# Altium PCB STM32.PcbDoc
Units mm, origin at the board's own origin, x right, y up, seen from the top; angles counter-clockwise.
Board outline 45.69 x 44.56 mm, 4 copper layers (L1[SIG], L2[GND], L3[GND], L4[SIG]), stack 1.591 mm thick; 35 components, 27 nets, 170 pads, 85 vias.
Unrouted connection lines stored in the file: 1.
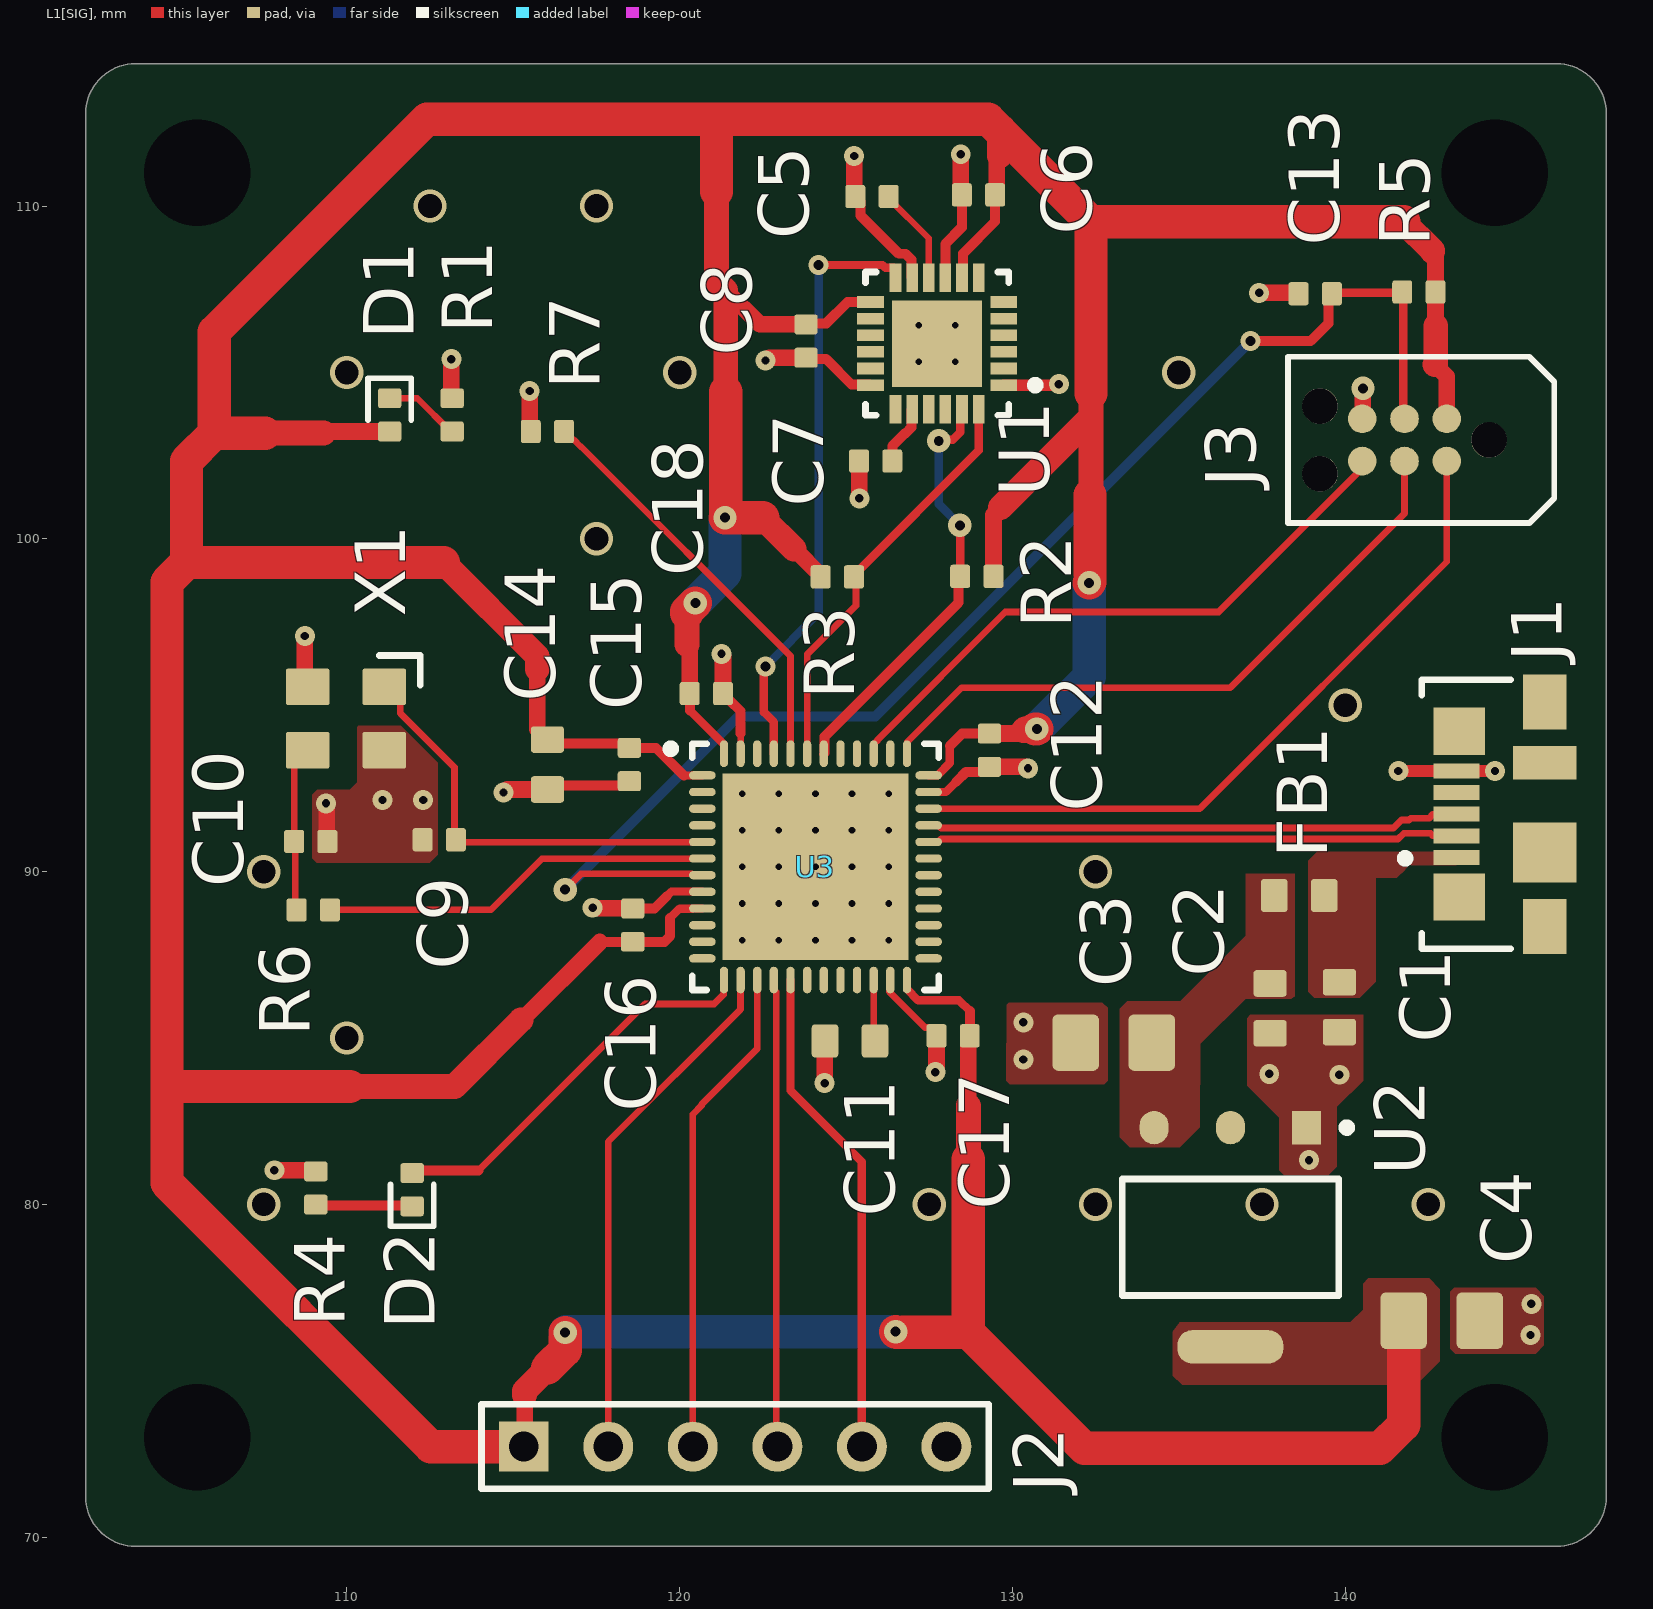
[diagram p0: L1[SIG] view]
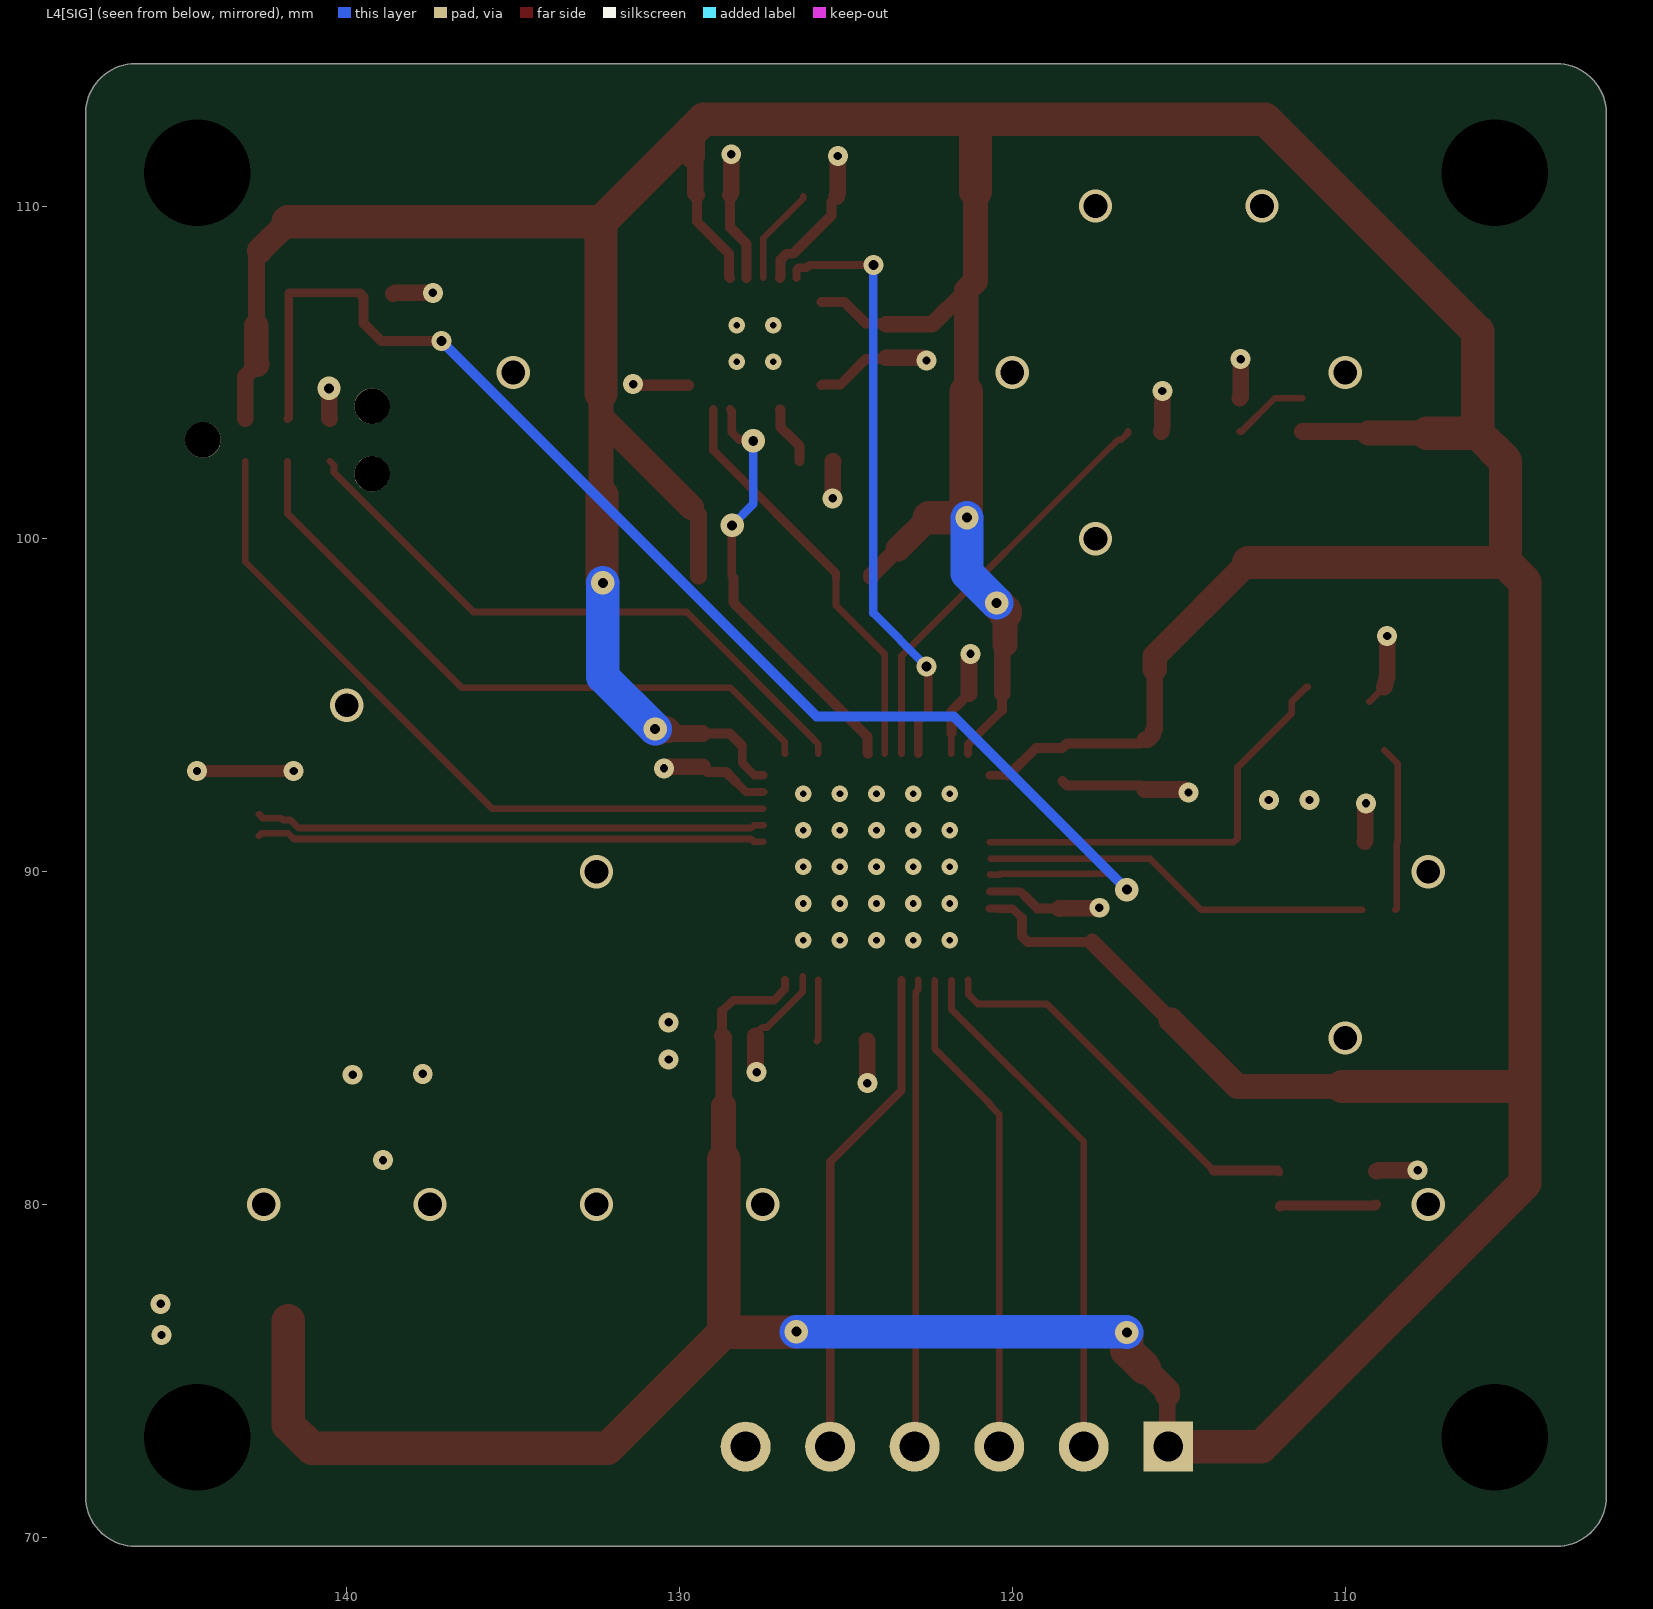
[diagram p1: L4[SIG] view, seen from below]
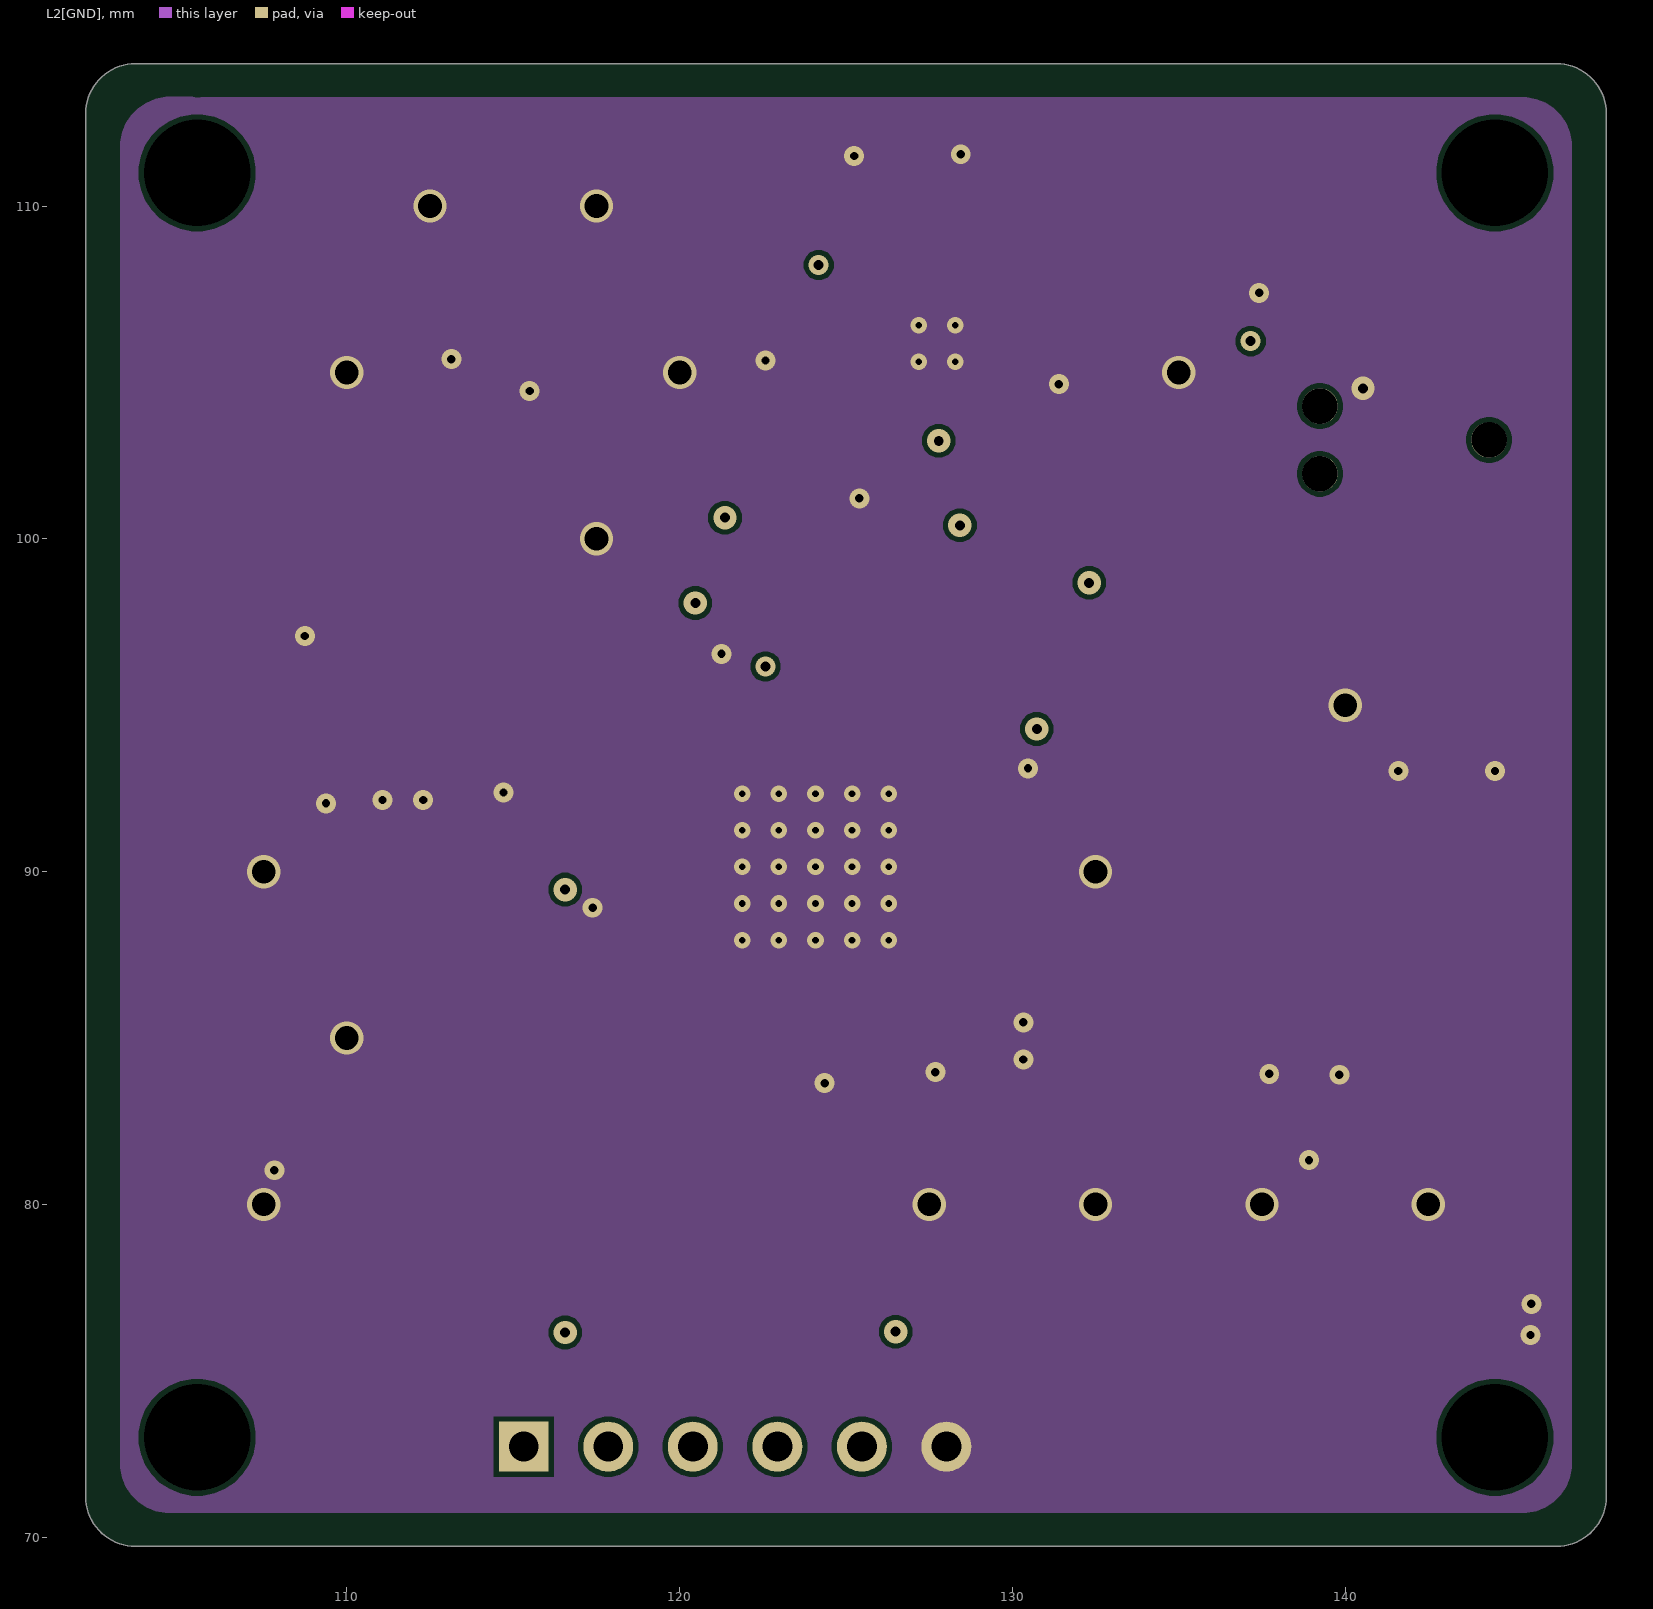
[diagram p2: L2[GND]]
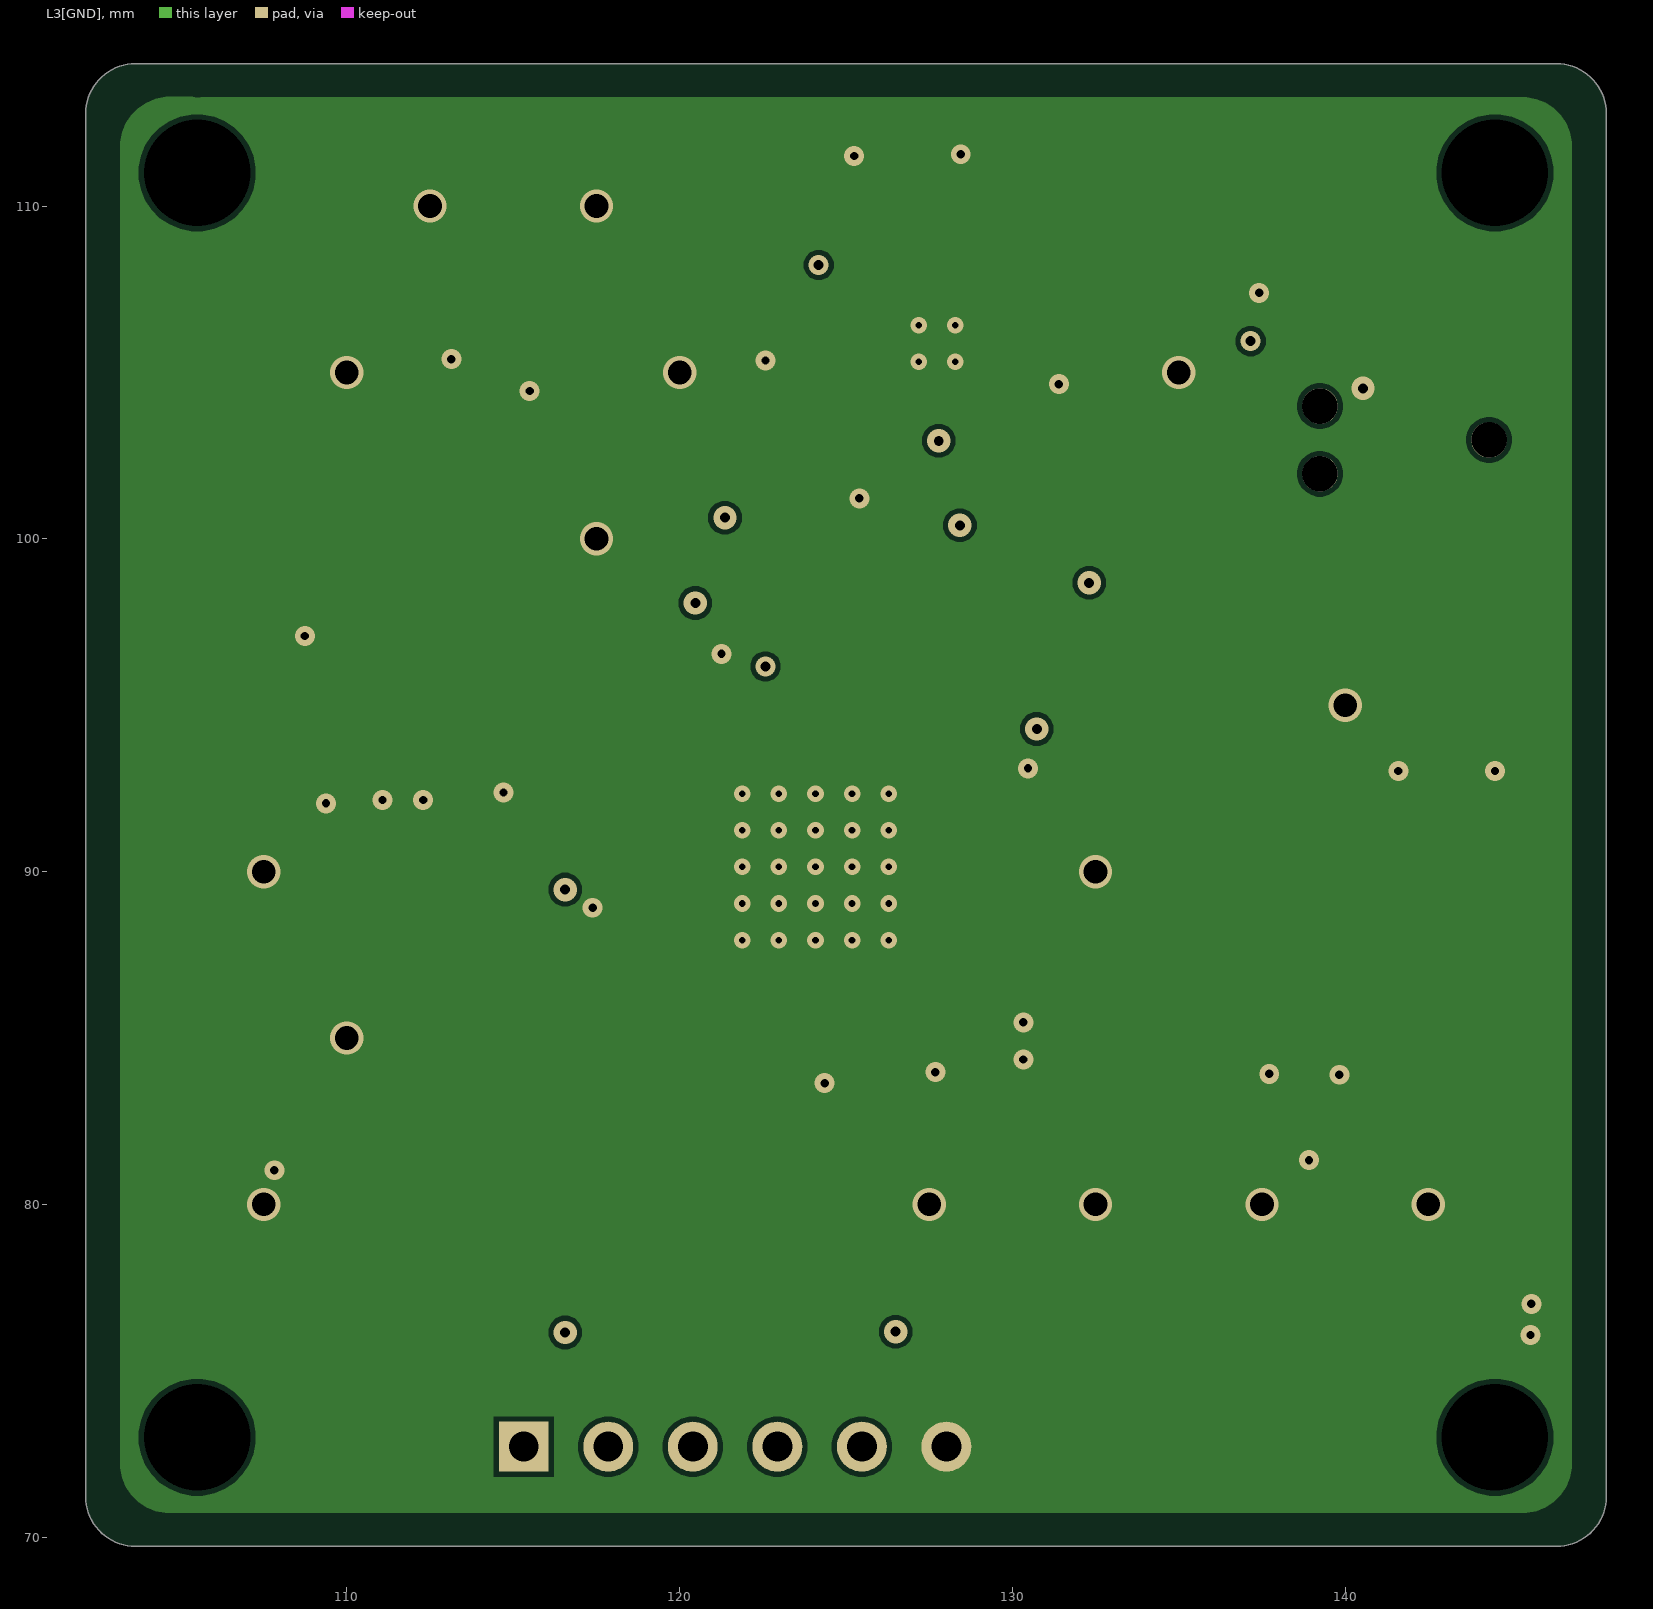
[diagram p3: L3[GND]]
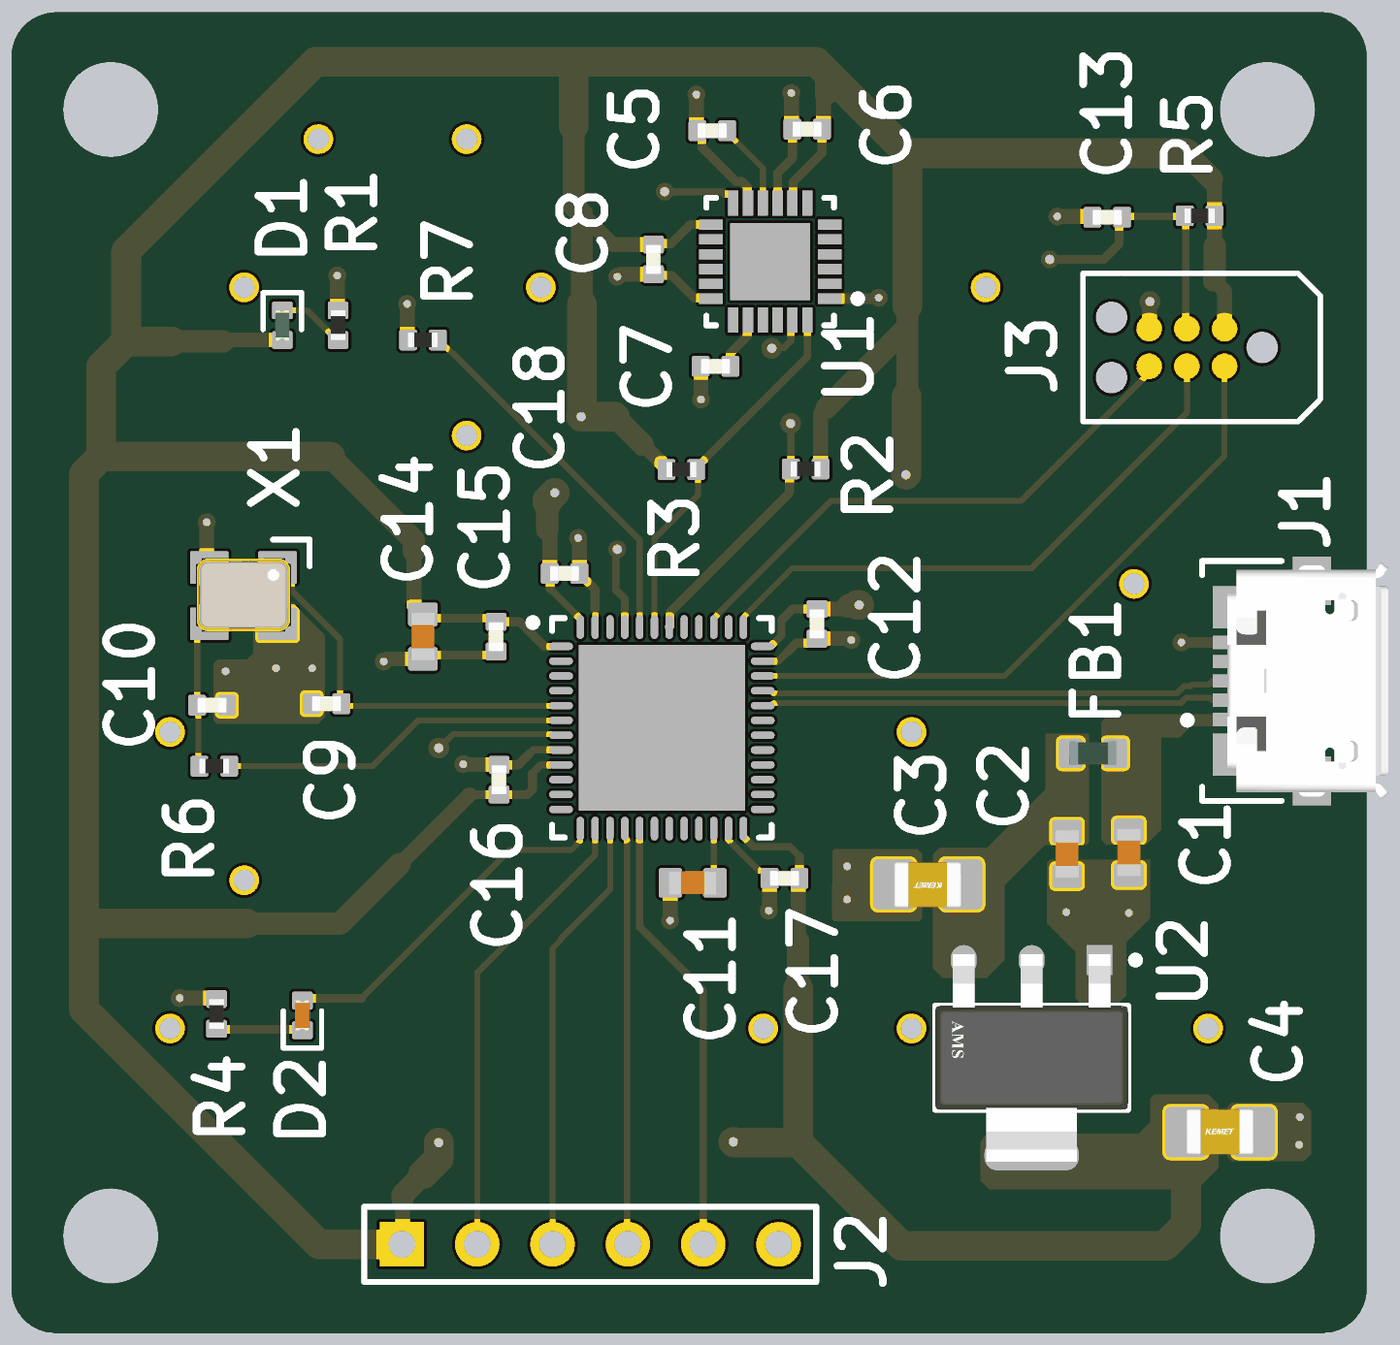
[diagram p4: 3D render of the assembled board from above, using the file's embedded part models]

## Layer stack, top to bottom
Top Solder: solder mask 0.0127, SM-001, Dk 4
L1[SIG]: signal copper 0.035
Dielectric 1: prepreg 0.2104, PP-017, Dk 4.4
L2[GND]: signal copper 0.0175
Dielectric 3: core 1.065, Core-039, Dk 4.6
L3[GND]: signal copper 0.0175
Dielectric 5: prepreg 0.2104, PP-017, Dk 4.4
L4[SIG]: signal copper 0.035
Bottom Solder: solder mask 0.0127, SM-001, Dk 4

## Board outline
102.153,71.222 102.153,112.778 cw(c103.653,112.778) 103.653,114.278 146.347,114.278 cw(c146.347,112.778) 147.847,112.778 147.847,71.222 cw(c146.347,71.222) 146.347,69.722 103.653,69.722 cw(c103.653,71.222)

## Design rules (kind name [scope] priority, off if disabled: settings)
Clearance [All] p1: gap=0.15 ignorepadtopadclearanceinfootprint=FALSE
DiffPairsRouting [All] p1: maxlimit=0.254 minlimit=0.127 mostfreqgap=0.254 toplayer_maxgap=0.127 toplayer_prefgap=0.127 toplayer_minwidth=0.203 toplayer_maxwidth=0.203 toplayer_prefwidth=0.203 bottomlayer_maxgap=0.127 bottomlayer_prefgap=0.127 bottomlayer_minwidth=0.203 bottomlayer_maxwidth=0.203 bottomlayer_prefwidth=0.203 impedanceprofiledriven=TRUE impedanceprofileid={67ABD6B7-572A-422F-AA8D-473EE327C9B9} impedanceprofilevalue=90.000000 maxuncoupledlength=12.7
PolygonConnect [All] p1: connectstyle=Direct reliefconductorwidth=0.254 reliefentries=4 polygonreliefangle="45 Angle" airgapwidth=0.254
RoutingVias [All] p1: holewidth=0.3 width=0.7 viastyle="Through Hole" minholewidth=0.25 minwidth=0.55 maxholewidth=0.4 maxwidth=0.9
SolderMaskExpansion [All] p1: expansion=0.102 istentingtop=FALSE
UnRoutedNet [All] p1: checkbadconnections=TRUE
Width [All] p1: maxlimit=1 minlimit=0.2 preferedwidth=0.3 midlayer1_minwidth=0.254 midlayer1_maxwidth=0.254 midlayer1_prefwidth=0.254 midlayer2_minwidth=0.254 midlayer2_maxwidth=0.254 midlayer2_prefwidth=0.254 minimp=50.000000 maximp=50.000000 favimp=50.000000
28 further rules are at their usual default settings.

## Classes and differential pairs
differential pair class DIFF_USB: USB_D
differential pair USB_D: +USB_D_P -USB_D_N

## Components (designator, comment, footprint, x,y, rotation, side; value= is the part's Value field where it differs from the comment)
C1 "2u2" CAP_0603 139.827,85.928 r270 top
C2 "2u2" CAP_0603 137.744,85.889 r270 top
C3 "22u" CAP_0805 133.045,84.861 r180 top
C4 "22u" CAP_0805 142.9,76.505 r0 top
C5 "100n" CAP_0402 125.781,110.287 r0 top
C6 "10n" CAP_0402 128.981,110.338 r0 top
C7 "2n2" CAP_0402 125.89,102.337 r0 top
C8 "100n" CAP_0402 123.8,105.943 r90 top
C9 "100n" CAP_0402 112.776,90.957 r0 top
C10 "100n" CAP_0402 108.915,90.907 r180 top
C11 "2u2" CAP_0603 125.12,84.912 r180 top
C12 "100n" CAP_0402 129.311,93.65 r90 top
C13 "100n" CAP_0402 139.098,107.366 r0 top
C14 "2u2" CAP_0603 116.027,93.218 r270 top
C15 "100n" CAP_0402 118.491,93.218 r90 top
C16 "100n" CAP_0402 118.593,88.392 r270 top
C17 "100n" CAP_0402 128.219,85.065 r0 top
C18 "100n" CAP_0402 120.802,95.352 r180 top
D1 "GREEN" LED_0402_GREEN 111.286,103.725 r90 top
D2 "RED" LED_0402_RED 111.963,80.442 r270 top
FB1 "120R" FB_0603 138.62,89.281 r180 top
J1 "473460001" FP-473460001-MFG 145.65,91.725 r90 top
J2 "Header 6" HDR1X6 115.316,72.72 r0 top
J3 "TC2030" TC2030-FP 141.783,102.972 r180 top
R1 "1k" RES_0402 113.166,103.725 r270 top
R2 "2k2" RES_0402 128.931,98.874 r0 top
R3 "2k2" RES_0402 124.739,98.857 r180 top
R4 "1k" RES_0402 109.068,80.493 r270 top
R5 "10k" RES_0402 142.215,107.417 r0 top
R6 "0R" RES_0402 108.991,88.849 r180 top
R7 "10k" RES_0402 116.027,103.226 r0 top
U1 "MPU-6050" IS-QFN-24_V 127.737,105.867 r180 top
U2 "ams1117" FP-ams1117-IPC_C 136.55,79.012 r270 top
U3 "STM32F411CEU6" STM-UFQFPN48_L 124.083,90.142 r0 top
X1 "24MHz" XTAL_3225 109.975,94.6 r180 top

## Footprints (in the part's own frame and the unit in brackets; to place one, negate y for a bottom-side part, rotate by r counter-clockwise, add the part's x,y. Pads: shape width x height; smd on the part's side, far side on the other; paste and mask are expansions set on the pad)
CAP_0402 [mm]
  rrect25% 0.6x0.7 smd: 1(-0.5,0) 2(0.5,0)
  body extent -0.5,-0.26 0.5,0.26, height 0.37
CAP_0603 [mm]
  rrect25% 0.8x1 smd: 1(-0.75,0) 2(0.75,0)
  body extent -0.8,-0.4 0.8,0.4, height 0.51
CAP_0805 [mm]
  rrect25% 1.4x1.7 smd: 1(-1.143,0) 2(1.143,0)
  body extent -1.15,-0.76 1.15,0.79, height 1.01
FB_0603 [mm]
  rrect25% 0.8x1 smd: 1(-0.75,0) 2(0.75,0)
  body extent -0.8,-0.4 0.8,0.4, height 0.81
FP-473460001-MFG [mm]
  rect 0.45x1.38 smd paste+0 mask+0: 1(-1.3,2.31) 2(-0.65,2.31) 3(0,2.31) 4(0.65,2.31) 5(1.3,2.31)
  rect 1.425x1.55 smd paste+0 mask+0: 6(-2.488,2.225) 7(2.488,2.225)
  rect 1.65x1.3 smd paste+0 mask+0: 8(-3.375,-0.35) 11(3.375,-0.35)
  rect 1.8x1.9 smd paste+0: 9(-1.15,-0.35)
  rect 1x1.9 smd paste+0 mask+0: 10(1.55,-0.35)
  silkscreen extent -4.05,0.67 4.05,3.97, body extent -4.3,-2.48 4.3,3.45, height 0.25
FP-ams1117-IPC_C [mm]
  rect 1.004x0.872 smd paste+0 mask+0: 1(-3.295,2.29)
  rrect100% 1.004x0.872 smd paste+0 mask+0: 2(-3.295,0) 3(-3.295,-2.29)
  rrect87% 1.004x3.182 smd paste+0 mask+0: 4(3.295,0)
  silkscreen extent -3.42,-3.25 1.75,3.63, body extent -3.9,-3.35 3.9,3.35, height 0.25
HDR1X6 [mm] "Connector; Header; 6 Position"
  rect 1.5x1.5 hole 0.9: 1(0,0)
  round 1.5 hole 0.9: 2(2.54,0) 3(5.08,0) 4(7.62,0) 5(10.16,0) 6(12.7,0)
  silkscreen extent -1.27,-1.27 13.97,1.27
IS-QFN-24_V [mm] "QFN, 24-Leads, Body 4x4mm, Pitch 0.5mm, Thermal Pad 2.7x2.6mm"
  rect 0.8x0.35 smd: 1(-2,1.25) 2(-2,0.75) 3(-2,0.25) 4(-2,-0.25) 5(-2,-0.75) 6(-2,-1.25) 13(2,-1.25) 14(2,-0.75) 15(2,-0.25) 16(2,0.25) 17(2,0.75) 18(2,1.25)
  rect 0.35x0.85 smd mask+0.102: 7(-1.25,-1.975) 8(-0.75,-1.975) 9(-0.25,-1.975) 10(0.25,-1.975) 11(0.75,-1.975) 12(1.25,-1.975) 19(1.25,1.975) 20(0.75,1.975) 21(0.25,1.975) 22(-0.25,1.975) 23(-0.75,1.975) 24(-1.25,1.975)
  rect 2.7x2.6 smd: 25(0,0)
  silkscreen extent -3.08,-2.15 2.15,2.15, body extent -2,-2 2,2, height 0.95
LED_0402_GREEN [mm]
  rrect25% 0.6x0.7 smd: A(-0.5,0) K(0.5,0)
  silkscreen extent -0.15,-0.65 1.1,0.65, body extent -0.51,-0.25 0.51,0.25, height 0.45
LED_0402_RED [mm]
  rrect25% 0.6x0.7 smd: A(-0.5,0) K(0.5,0)
  silkscreen extent -0.15,-0.65 1.1,0.65, body extent -0.51,-0.25 0.51,0.25, height 0.45
RES_0402 [mm]
  rrect25% 0.6x0.7 smd: 1(-0.5,0) 2(0.5,0)
  body extent -0.5,-0.25 0.5,0.25, height 0.3
STM-UFQFPN48_L [mm] "QFN, 48-Leads, Body 7.1x7.1mm, Pitch 0.5mm, Thermal Pad 5.6x5.6mm, IPC High Density"
  oval 0.8x0.25 smd: 1(-3.4,2.75) 2(-3.4,2.25) 3(-3.4,1.75) 4(-3.4,1.25) 5(-3.4,0.75) 6(-3.4,0.25) 7(-3.4,-0.25) 8(-3.4,-0.75) 9(-3.4,-1.25) 10(-3.4,-1.75) 11(-3.4,-2.25) 12(-3.4,-2.75) 25(3.4,-2.75) 26(3.4,-2.25) 27(3.4,-1.75) 28(3.4,-1.25) 29(3.4,-0.75) 30(3.4,-0.25) 31(3.4,0.25) 32(3.4,0.75) 33(3.4,1.25) 34(3.4,1.75) 35(3.4,2.25) 36(3.4,2.75)
  oval 0.25x0.8 smd: 13(-2.75,-3.4) 14(-2.25,-3.4) 15(-1.75,-3.4) 16(-1.25,-3.4) 17(-0.75,-3.4) 18(-0.25,-3.4) 19(0.25,-3.4) 20(0.75,-3.4) 21(1.25,-3.4) 22(1.75,-3.4) 23(2.25,-3.4) 24(2.75,-3.4) 37(2.75,3.4) 38(2.25,3.4) 39(1.75,3.4) 40(1.25,3.4) 41(0.75,3.4) 42(0.25,3.4) 43(-0.25,3.4) 44(-0.75,3.4) 45(-1.25,3.4) 46(-1.75,3.4) 47(-2.25,3.4) 48(-2.75,3.4)
  rect 5.6x5.6 smd: 49(0,0)
  silkscreen extent -4.47,-3.7 3.7,3.7, body extent -3.55,-3.55 3.55,3.55, height 0.6
TC2030-FP [mil]
  round 33.98 smd paste-17.01: 1(-50,-25) 2(-50,25) 3(0,-25) 4(0,25) 5(50,-25) 6(50,25)
  round 42.01 hole 42.01 unplated: MH(-100,0) MH(100,-40) MH(100,40)
  silkscreen extent -177,-98 138,98
XTAL_3225 [mm]
  rrect10% 1.3x1.1 smd: 1(-1.15,-0.95) 2(1.15,-0.95) 3(1.15,0.95) 4(-1.15,0.95)
  silkscreen extent -2.23,-1.89 -1,-1, body extent -1.6,-1.28 1.6,1.22, height 0.61

## Part data
C1 C2 C11 C14: library part CAP_0603, "Capacitor SMD 0603"
C3 C4: library part CAP_0805, "Capacitor SMD 0805"
C5 C6 C7 C8 C9 C10 C12 C13 C15 C16 C17 C18: library part CAP_0402, "Capacitor SMD 0402"
D1: library part LED_0402_GREEN, "LED 0402 GREEN SMD"
D2: library part LED_0402_RED, "LED 0402 RED SMD"
FB1: library part FB_0603, "Ferrite Bead SMD 0603"
J1: library part CMP-2000-05246-2, "CONN RCPT USB2.0 MICRO B SMD R/A", Current Rating=1.8A, Manufacturer=Molex, Package=0, Temperature="-30°C to +85°C", Temperature Range High=+85°C, Temperature Range Low=-30°C, Voltage Rating=30V, Automotive=No, Category=Conn, ComponentLink2Description=Datasheet, ComponentLink2URL=https://www.molex.com/webdocs/datasheets/pdf/en-us/0473460001_IO_CONNECTORS.pdf, Conn Orientation="Right Angle", Contact Material=Gold,Nickel, Device Class L1=Connectors, Device Class L2="USB Connectors", Device Class L3=unset, Digikey Description="CONN RCPT USB2.0 MICRO B SMD R/A", Footprint Url=https://www.molex.com/pdm_docs/sd/473460001_sd.pdf, Height=2.945mm, Is Female=yes, Lead Free=Yes, Manufacturer Part Number=473460001, Number Of Contacts=5, Octopart=https://octopart.com/47346-0001-molex-7164928, Pitch=0.65mm, RoHS=TRUE, Shielding=true, Usb Standard="USB 2.0"
J2: "Header, 6-Pin", LatestRevisionDate=17-Jul-2002, LatestRevisionNote="Re-released for DXP Platform.", Publisher="Altium Limited"
J3: "Tag-Connect No-Solder SWD Debug Connector DO NOT PLACE", Manufacturer=Tag-Connect, Manufacturer Part Number=TC2030
R1 R2 R3 R4 R5 R6 R7: library part RES_0402, "Resistor SMD 0402"
U1: library part CMP-1753-00002-2, "3-Axis Gyroscope, Accelerometer and a Digital Motion Processor(TM) (DMP), 2.375 to 3.46 V, -40 to 85 degC, 24-Pin QFN, RoHS, Tape and Reel", Manufacturer=InvenSense, Standard Package=5,000, Category=Sensors,Transducers, Datasheet URL=http://datasheet.octopart.com/MPU-6050-InvenSense-datasheet-14421344.pdf, Datasheet Version="Rev. 3.3, 05/2012", Dynamic Catalog=MPU-6000™Series, Family=Multifunction, Featured Product=MPU-60506-Axis,IntegratedI²CSolution, Manufacturer URL=http://www.invensense.com/, Online Catalog=MPU-6000™Series, Other Names="1428-1007-2 / MPU6050", Output Type=Digital, Sensor Type=MotionTracking, Unit PriceUSD=Digital
U2: library part CMP-209535-000002-1, "1A LOW DROPOUT VOLTAGE REGULATOR", RoHS Compliant=Yes
U3: library part CMP-0243-00165-1, "ARM Cortex-M4 32-bit MCU+FPU, 512 KB Flash, 128 KB RAM, 36 I/Os, 48-Pin UFQFPN, -40 to 85 degC, Tray", I/Os (High Current)=36, Operating Frequency(F) (Processor speed) (MHz)=100, Package Description=UFQFPN48, Package Reference="48-Pin Ultra Thin Fine Pitch Quad Flat No-Lead, 7 x 7 x 0.6 mm Body, 0.5 mm Pitch, Exposed Pad", Supply Voltage(Vcc) min (V)=1.7, ComponentLink1Description="Manufacturer URL", ComponentLink1URL=http://www.st.com/, ComponentLink2Description=Datasheet, ComponentLink2URL=http://www.st.com/st-web-ui/static/active/en/resource/technical/document/datasheet/DM00115249.pdf, Core="ARM Cortex-M4", DatasheetVersion="Rev. 6", FLASH Size (Prog) (kB)=512, Internal RAM Size (kB)=128, Mounting Technology="Surface Mount", Packing=Tray
X1: library part TSX-3225_24.0000MF15X-AC, "Crystal SMD 24MHz 10PPM 7pF 3225", Manufacturer=Epson, Manufacturer Part Number="TSX-3225 24.0000MF15X-AC"

## Free pads (board coordinates)
  round 1.067 hole 3.2 unplated: 3(105.5,73) 3(105.5,111) 3(144.5,73) 3(144.5,111) 3(144.5,111) 3(144.5,111)

## Via types
v1: diameter 0.5, hole 0.2, L1[SIG] to L4[SIG], 29 vias
v2: diameter 0.6, hole 0.25, L1[SIG] to L4[SIG], tented both sides, 28 vias
v3: diameter 1, hole 0.711, L1[SIG] to L4[SIG], 15 vias
v4: diameter 0.7, hole 0.3, L1[SIG] to L4[SIG], tented both sides, 10 vias
v5: diameter 0.6, hole 0.3, L1[SIG] to L4[SIG], tented both sides, 3 vias

## Nets (pads, with @x,y where several pads share a name; then routed paths per layer and width w, separated by ;. In a path a pad name is that pad's centre, name@x,y a point inside that pad or via, vN(x,y) a via of type N, cw(c..) or ccw(c..) an arc to the next point about the centre after c; other vN are vias at no path point)
3V3: C4.1 C6.2 C8.2 C12.2 C14.1 C15.2 C16.2 C17.2 C18.2 D1.A J2.1 J3.1 R2.2 R3.2 R5.2 U1.8 U1.13 U2.2 U2.4 U3.1 U3.9 U3.24 U3.36 U3.48 | length 235.6
  L1[SIG] w0.25: 119.718,88.603 120.003,88.888 120.403,88.888 120.408,88.892 U3.9@120.678,88.892 ; 120.126,92.887 120.402,92.887 120.408,92.892 U3.1@120.677,92.892 ; 120.312,94.838 121.333,93.817 U3.48 ; U3.24 126.833,86.467 127.168,86.131 128.397,86.131 128.719,85.809 ; U3.36 127.758,92.892 127.758,92.905 128.118,93.265 128.118,93.777
  L1[SIG] w0.3: C14.1 116.152,93.843 118.366,93.843 C15.2 119.295,93.718 120.126,92.887 ; 117.602,87.884 117.61,87.892 C16.2 119.542,87.892 119.718,88.068 119.718,88.603 ; 120.312,94.838 C18.2@120.312,95.342 ; C8.2 123.833,106.477 124.409,106.477 125.05,107.117 U1.13 ; 128.118,93.777 128.491,94.15 C12.2 ; U1.8 128.512,107.867 128.512,108.568 129.481,109.538 C6.2 ; C17.2 128.719,85.809
  L1[SIG] w0.5: 109.296,103.175 109.346,103.225 D1.A ; 115.24,85.547 115.265,85.547 117.602,87.884 ; J2.1 115.341,72.746 115.341,74.27 ; 115.722,96.088 115.722,94.273 115.777,94.218 115.777,94.118 115.927,93.968 C14.1 ; 120.218,96.825 120.302,96.741 C18.2 ; 121.387,107.467 122.411,106.443 C8.2 ; 123.435,99.694 123.451,99.695 124.239,98.907 R3.2 ; 128.676,82.956 128.676,85.022 C17.2 ; C12.2 130.243,94.15 130.327,94.234 ; R2.2 129.431,100.729 129.642,100.94 ; C6.2 129.531,110.388 129.531,111.421 129.616,111.506 ; 142.621,108.636 142.715,108.542 R5.2 142.715,106.409 142.723,106.401 ; 142.697,105.232 143.053,104.877 J3.1
  L1[SIG] w0.7: 128.651,82.982 128.676,82.956
  L1[SIG] w0.75: 107.544,103.175 109.296,103.175 ; 110.084,83.541 113.233,83.541 115.24,85.547 ; 112.903,99.289 115.722,96.469 115.722,96.088 ; 115.341,74.27 115.341,74.397 116.027,75.082 ; 120.218,96.825 120.218,97.765 ; 121.107,110.439 121.107,107.747 121.387,107.467 121.387,104.419 ; 122.494,100.635 123.435,99.694 ; 128.676,81.356 128.676,82.956 ; 129.616,111.506 129.616,112.268 ; 129.642,100.94 132.359,103.657 ; 130.327,94.234 130.378,94.285 v4@130.683,94.285 ; 132.334,101.321 132.359,101.346 132.359,103.657 ; 132.359,104.369 132.359,103.657 ; 141.757,109.525 142.621,108.661 142.621,108.636 ; 142.697,105.232 142.723,105.258 142.723,106.401
  L1[SIG] w1: 107.544,103.175 106.02,103.175 ; 110.084,83.541 104.597,83.541 ; 112.903,99.289 105.181,99.289 ; J2.1 112.522,72.72 104.597,80.645 104.597,83.541 ; 116.027,75.082 116.561,75.616 v4(116.561,76.149) ; 120.218,97.765 120.218,97.815 v4(120.472,98.069) ; 121.107,110.439 121.107,112.609 ; 121.387,104.419 121.387,100.66 v4(121.361,100.635) 122.494,100.635 ; v4(126.492,76.175) 126.51,76.157 128.676,76.157 ; 128.676,81.356 128.676,76.157 ; v4@130.683,94.285 v4(130.734,94.285) ; v4(132.309,98.679) 132.334,98.704 132.334,101.321 ; 132.359,104.369 132.359,109.525 ; C4.1 141.757,73.381 141.046,72.669 132.164,72.669 128.676,76.157 ; 141.757,109.525 132.359,109.525 ; 104.597,83.541 104.597,98.704 105.181,99.289 ; 105.181,99.289 105.181,102.337 106.02,103.175 ; 106.02,103.175 106.02,106.223 112.406,112.609 121.107,112.609 ; 121.107,112.609 129.275,112.609 129.616,112.268 132.359,109.525
  L4[SIG] w1: v4(116.561,76.149) 116.586,76.175 v4(126.492,76.175) ; v4(120.472,98.069) 121.361,98.958 v4(121.361,100.635) ; v4(130.734,94.285) 132.309,95.86 v4(132.309,98.679)
+5V: C2.1 C3.1 FB1.2 U2.3
GND: C1.2 C2.2 C3.2 C4.2 C5.1 C6.1 C7.1 C8.1 C9.1 C10.1 C11.2 C12.1 C13.1 C14.2 C15.1 C16.1 C17.1 C18.1 J1.5 J2.6 J3.5 R1.1 R4.1 R7.1 U1.1 U1.9 U1.11 U1.18 U1.25 U2.1 U3.8 U3.23 U3.35 U3.47 U3.49 X1.2 X1.4 | length 45.3
  L1[SIG] w0.2: X1.2 X1.2@109.275,95.1 ; C10.1 C10.1@109.441,90.932 ; U3.47 121.842,93.552 121.842,94.137 ; U3.23@126.304,86.846 126.304,86.387 127.376,85.315 127.519,85.315 127.719,85.115 C17.1
  L1[SIG] w0.25: 119.609,89.256 119.754,89.401 U3.8@120.673,89.401 ; U3.35 127.758,92.392 127.759,92.391 128.002,92.391 128.321,92.71
  L1[SIG] w0.3: C14.2 116.152,92.593 118.366,92.593 C15.1 ; C16.1 119.245,88.892 119.609,89.256 ; C18.1@121.502,95.152 121.828,94.826 121.828,94.151 ; C8.1 123.837,105.406 124.405,105.406 125.169,104.642 125.712,104.642 U1.18 ; C5.1 125.431,110.137 125.431,109.722 126.586,108.567 126.786,108.567 126.962,108.391 126.962,107.867 U1.11 ; U1.9 127.987,108.868 128.481,109.362 C6.1 ; 128.321,92.71 128.611,93 129.161,93 C12.1
  L1[SIG] w0.35: U1.1 131.363,104.617 v2(131.394,104.648) ; v2(141.6,93.025) J1.5 v2(144.5,93.025)
  L1[SIG] w0.5: v2(107.823,81.026) 108.968,81.026 R4.1 ; v2(108.737,97.079) 108.737,95.85 X1.2 ; v2(109.372,92.05) 109.392,92.03 109.392,90.93 C10.1 ; v2(113.14,105.401) 113.14,104.275 R1.1 ; v2(114.706,92.38) 114.733,92.38 114.822,92.468 C14.2 ; v2(115.494,104.445) 115.494,103.326 R7.1 ; v2(117.386,88.914) 117.397,88.903 118.582,88.903 C16.1 ; v2(121.26,96.545) 121.26,96.518 121.302,96.476 C18.1 ; v2(122.58,105.359) 122.607,105.359 122.692,105.443 C8.1 ; v2(124.358,83.642) 124.364,83.648 124.364,84.906 C11.2 ; v2(125.247,111.506) 125.247,110.387 C5.1 ; C7.1 125.4,102.237 v2(125.4,101.219) ; v2(127.686,83.972) 127.686,83.999 127.719,84.033 C17.1 ; v2(128.448,111.557) 128.448,110.438 C6.1 ; C12.1 130.394,93.15 130.441,93.103 v2(130.468,93.103) ; v2(137.414,107.391) 138.548,107.391 C13.1 ; J3.5@140.508,103.611 J3.5 140.525,103.619 140.525,104.508 v4(140.538,104.521)
  other v1: 121.883,87.942 122.983,87.942 124.083,87.942 125.183,87.942 126.283,87.942 121.883,89.042 122.983,89.042 124.083,89.042 125.183,89.042 126.283,89.042 121.883,90.142 122.983,90.142 124.083,90.142 125.183,90.142 126.283,90.142 121.883,91.242 122.983,91.242 124.083,91.242 125.183,91.242 126.283,91.242 121.883,92.342 122.983,92.342 124.083,92.342 125.183,92.342 126.283,92.342 127.187,105.317 128.287,105.317 127.187,106.417 128.287,106.417
  other v2: 145.567,76.073 145.593,77.013 138.913,81.331 139.827,83.896 137.719,83.922 130.327,84.353 130.327,85.471 111.074,92.151 112.293,92.151
  other v3: 107.5,80 127.5,80 132.5,80 137.5,80 142.5,80 110,85 107.5,90 132.5,90 140,95 117.5,100 110,105 120,105 135,105 112.5,110 117.5,110
IMU_CPOUT: C7.2 U1.20 | length 1.8
  L1[SIG] w0.3: C7.2 126.39,102.794 126.764,103.167 126.786,103.167 126.962,103.343 126.962,103.867 U1.20
IMU_INT: U1.12 U3.45 | length 18.1
  L1[SIG] w0.25: v5(122.58,96.164) 122.53,96.114 122.53,94.793 122.833,94.49 U3.45 ; v5(124.181,108.229) 126.099,108.229 126.187,108.142 126.437,108.142 126.487,108.092 U1.12
  L4[SIG] w0.25: v5(122.58,96.164) 124.181,97.765 v5(124.181,108.229)
IMU_REGOUT: C5.2 U1.10 | length 2.9
  L1[SIG] w0.2: C5.2 126.281,110.237 127.487,109.031 U1.10
IMU_SCL: R2.1 U1.23 U3.42 | length 12.8
  L1[SIG] w0.25: v4(127.787,102.946) 127.821,102.98 128.209,102.98 128.437,103.208 128.437,103.842 U1.23 ; R2.1@128.384,98.827 R2.1 128.431,100.398 v4(128.422,100.406)
  L1[SIG] w0.3: U3.42 124.358,93.567 124.358,94.055 128.384,98.082 R2.1@128.384,98.827
  L4[SIG] w0.25: v4(127.787,102.946) 127.787,101.041 v4(128.422,100.406)
IMU_SDA: R3.1 U1.24 U3.43 | length 12.5
  L1[SIG] w0.2: U3.43 123.833,96.528 125.298,97.993 R3.1@125.298,98.798
  L1[SIG] w0.25: R3.1@125.298,98.798 125.298,98.966 128.987,102.654 U1.24
LED_PWR_K: D1.K R1.2 | length 2.3
  L1[SIG] w0.2: D1.K 112.116,104.225 113.116,103.225 R1.2
MCU_BOOT0: R7.2 U3.44 | length 12.6
  L1[SIG] w0.2: R7.2 116.527,103.176 116.727,102.976 116.823,102.976 117.03,102.768 117.043,102.768 123.333,96.479 U3.44
MCU_LED_A: D2.A U3.13 | length 12
  L1[SIG] w0.2: D2.A D2.A@112.038,81.017 ; 113.961,81.017 118.965,86.021 121.037,86.021 121.323,86.307 121.323,86.732 U3.13
  L1[SIG] w0.3: D2.A@112.038,81.017 113.961,81.017
MCU_LED_K: D2.K R4.2 | length 2.9
  L1[SIG] w0.3: R4.2 109.093,79.967 111.938,79.967 D2.K
MCU_NRST: C13.2 J3.3 R5.1 U3.7 | length 41.2
  L1[SIG] w0.2: v4(116.561,89.459) 117.033,89.931 120.355,89.931 120.385,89.902 120.651,89.902 U3.7@120.664,89.915
  L1[SIG] w0.25: C13.2 139.624,107.391 141.74,107.391 141.749,107.383 141.749,103.641 J3.3
  L1[SIG] w0.3: v5(137.16,105.943) 138.963,105.943 139.497,106.477 139.497,107.264 C13.2
  L4[SIG] w0.3: v4(116.561,89.459) 121.768,94.666 125.882,94.666 v5(137.16,105.943)
MCU_OSC_IN: C9.2 U3.5 X1.1 | length 12.9
  L1[SIG] w0.2: X1.1 111.16,95.55 111.61,95.1 111.61,94.755 113.233,93.131 113.233,91 113.348,90.886 U3.5@120.676,90.886
MCU_OSC_OUT: R6.1 U3.6 | length 11.8
  L1[SIG] w0.2: R6.1 114.325,88.849 115.863,90.387 U3.6@120.651,90.387
MCU_PA4: J2.2 U3.14 | length 15.7
  L1[SIG] w0.2: J2.2 117.856,81.887 121.831,85.862 U3.14@121.831,86.74
MCU_PA5: J2.3 U3.15 | length 14.8
  L1[SIG] w0.2: J2.3 120.396,82.704 120.66,82.968 120.66,83.005 122.338,84.682 U3.15@122.338,86.737
MCU_PA6: J2.4 U3.16 | length 14.1
  L1[SIG] w0.2: U3.16 122.833,86.453 122.905,86.381 122.905,72.751 J2.4
MCU_PA7: J2.5 U3.17 | length 14.9
  L1[SIG] w0.25: U3.17 123.333,83.423 125.476,81.28 J2.5
MCU_SWCLK: J3.4 U3.37 | length 19.7
  L1[SIG] w0.2: U3.37 126.842,93.552 126.842,93.895 128.476,95.529 136.55,95.529 141.783,100.762 J3.4
MCU_SWDIO: J3.2 U3.34 | length 21.7
  L1[SIG] w0.2: U3.34 135.633,91.892 143.053,99.312 J3.2
MCU_SWO: J3.6 U3.39 | length 18.6
  L1[SIG] w0.2: U3.39 125.833,93.831 125.958,93.956 125.958,93.972 129.787,97.802 136.197,97.802 140.386,101.991 140.386,102.21 J3.6
MCU_VCAP1: C11.1 U3.22 | length 1.8
  L1[SIG] w0.2: U3.22 125.833,84.95 C11.1
USB_D_N: J1.2 U3.32 | length 15.3
  L1[SIG] w0.203: U3.32@127.49,90.899 127.777,90.899 127.855,90.977 141.588,90.977 141.764,91.154 142.561,91.154 142.64,91.075
USB_D_P: J1.3 U3.33 | length 15.4
  L1[SIG] w0.203: U3.33 127.77,91.392 127.855,91.307 141.451,91.307 141.695,91.552 141.919,91.552 141.969,91.602 142.517,91.602 142.64,91.725
VBUS: C1.1 FB1.1 J1.1
XTAL_IN: C10.2 R6.2 X1.3 | length 5
  L1[SIG] w0.2: R6.2 108.453,88.887 108.453,90.868 C10.2 108.415,93.24 X1.3
pads on no net: J1.4 J1.6 J1.7 J1.8 J1.9 J1.10 J1.11 J3.MH U1.2 U1.3 U1.4 U1.5 U1.6 U1.7 U1.14 U1.15 U1.16 U1.17 U1.19 U1.21 U1.22 U3.2 U3.3 U3.4 U3.10 U3.11 U3.12 U3.18 U3.19 U3.20 U3.21 U3.25 U3.26 U3.27 U3.28 U3.29 U3.30 U3.31 U3.38 U3.40 U3.41 U3.46

## Polygon pours and split planes (outlines as drawn)
GND on L1[SIG] "+3V3" (solid, pour order 7): 110.312,94.336 110.312,92.685 110.084,92.456 109.118,92.456 108.966,92.304 108.966,90.399 109.093,90.272 112.497,90.272 112.725,90.5 112.725,93.345 111.684,94.386 110.338,94.386
3V3 on L1[SIG] "GND" (solid, pour order 12): 135.026,76.454 140.157,76.454 140.538,76.835 140.538,77.622 140.691,77.775 142.519,77.775 142.85,77.445 142.85,75.286 142.138,74.574 135.103,74.574 134.823,74.854 134.823,76.175
GND on L1[SIG] "GND" (solid, pour order 13): 129.838,86.004 129.888,86.055 132.708,86.055 132.86,85.903 132.86,83.718 132.759,83.617 129.914,83.617 129.812,83.718
GND on L1[SIG] "GND" (solid, pour order 11): 143.307,75.514 143.154,75.667 143.154,77.368 143.281,77.495 145.72,77.495 145.974,77.241 145.974,75.768 145.72,75.514
GND on L1[SIG] "GND" (solid, pour order 9): 137.134,85.682 137.058,85.598 137.058,83.566 138.024,82.601 138.024,81.026 138.176,80.874 139.497,80.874 139.751,81.128 139.751,82.931 140.538,83.718 140.538,85.7 137.152,85.7
+5V on L1[SIG] "NONET_L-01_P-001" (solid, pour order 4): 137.008,88.075 135.039,86.106 133.452,86.106 133.223,85.877 133.223,82.017 133.528,81.712 135.026,81.712 135.636,82.321 135.646,84.836 135.661,84.836 137.008,86.182 138.455,86.182 138.506,86.233 138.481,86.258 138.481,89.941 137.033,89.941 137.008,89.967
VBUS on L1[SIG] "NONET_L-01_P-001" (solid, pour order 3): 143.434,90.653 143.383,90.602 139.167,90.602 138.887,90.322 138.887,86.385 139.065,86.208 140.437,86.208 140.919,86.69 140.919,89.814 141.554,89.814 141.961,90.221 141.986,90.195 143.332,90.195 143.332,90.576 143.307,90.602
GND on L2[GND] "GND" (solid, pour order 5): 105.435,113.284 105.471,113.273 145.311,113.273 cw(c145.311,111.773) 146.811,111.773 146.811,72.227 cw(c145.311,72.227) 145.311,70.727 104.689,70.727 cw(c104.689,72.227) 103.189,72.227 103.189,111.773 cw(c104.7,111.773) 104.7,113.284 105.461,113.284 cw(c105.461,113.259) 105.486,113.259 ccw(c105.461,113.259) 105.461,113.284 105.41,113.284
GND on L3[GND] "GND" (solid, pour order 6): 105.435,113.284 105.471,113.273 145.31,113.273 cw(c145.31,111.773) 146.81,111.773 146.81,72.227 cw(c145.31,72.227) 145.31,70.727 104.689,70.727 cw(c104.689,72.227) 103.189,72.227 103.189,111.773 cw(c104.7,111.773) 104.7,113.284 105.461,113.284 cw(c105.46,113.259) 105.486,113.259 ccw(c105.46,113.259) 105.46,113.284 105.41,113.284

## Silkscreen, mask and mechanical layers (free items; w line width, h text height)
Top Overlay:
  lines w0.175: 139.533,100.472 145.533,100.472 146.283,101.222 ; 139.533,105.472 145.533,105.472 146.283,104.722
Mechanical 13:
  the board outline again, w0.254

## Text inside footprints (layer, text, board x,y; h text height)
D1: Mechanical 13 "+" at 110.778,101.842 h0.5 r90
D2: Mechanical 13 "+" at 112.472,82.325 h0.5 r270